# EAGLE board unbiased electronic dice (EAGLE 9.6.0)
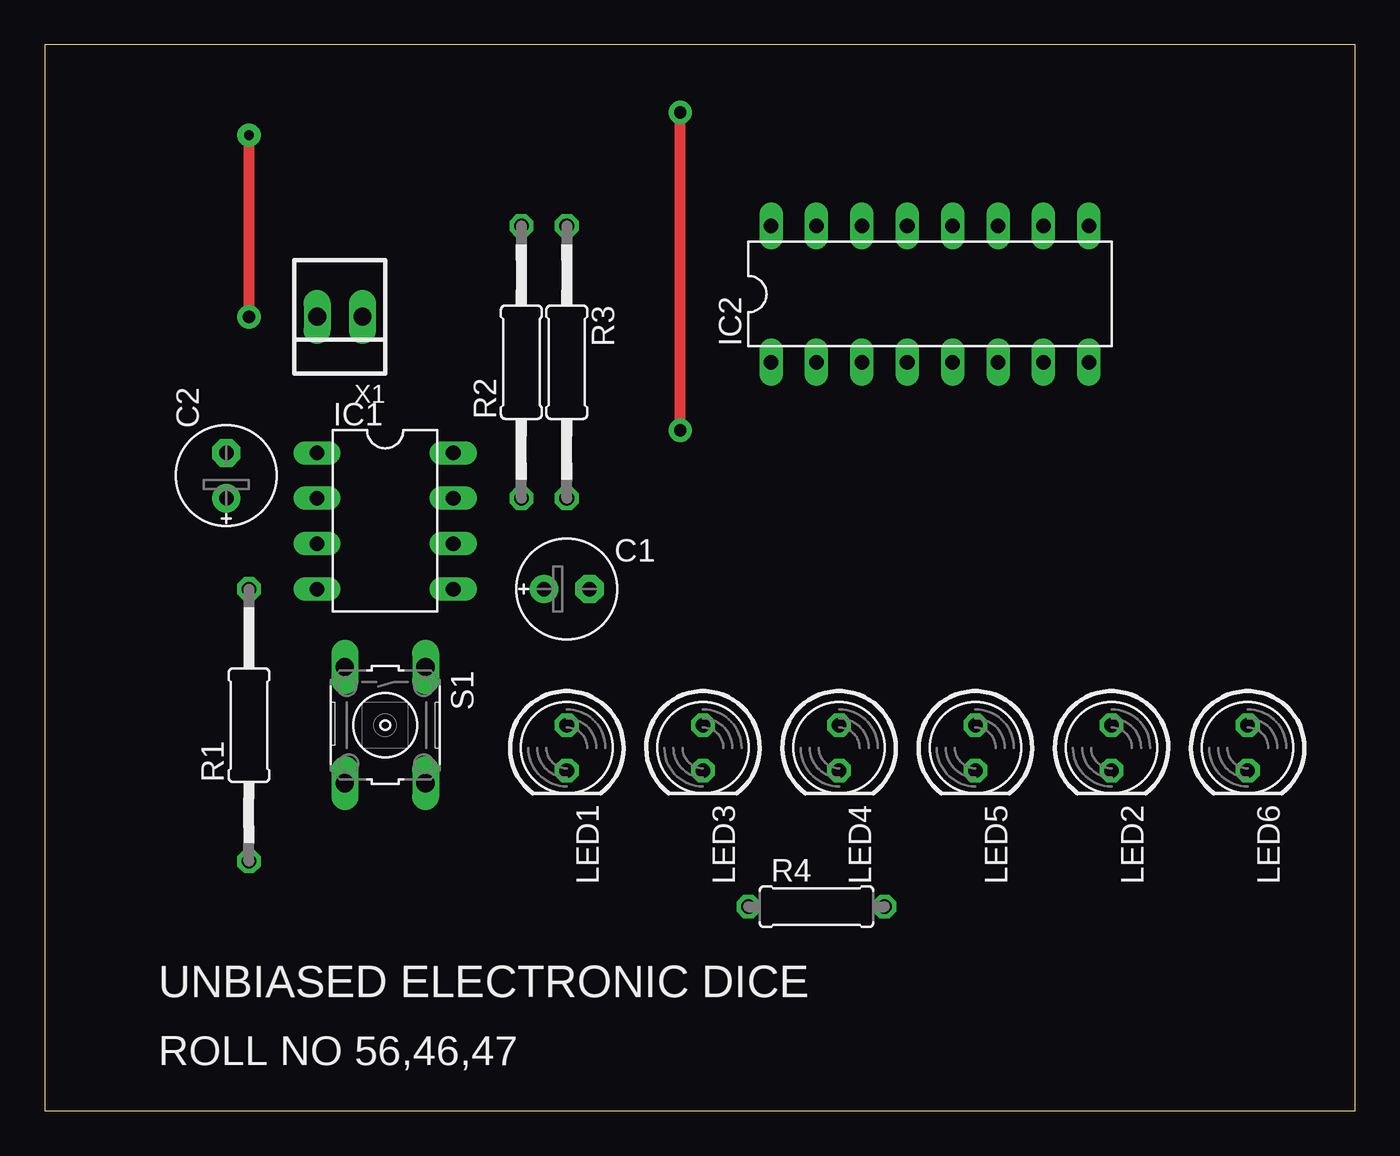
[diagram p0: board, top side]
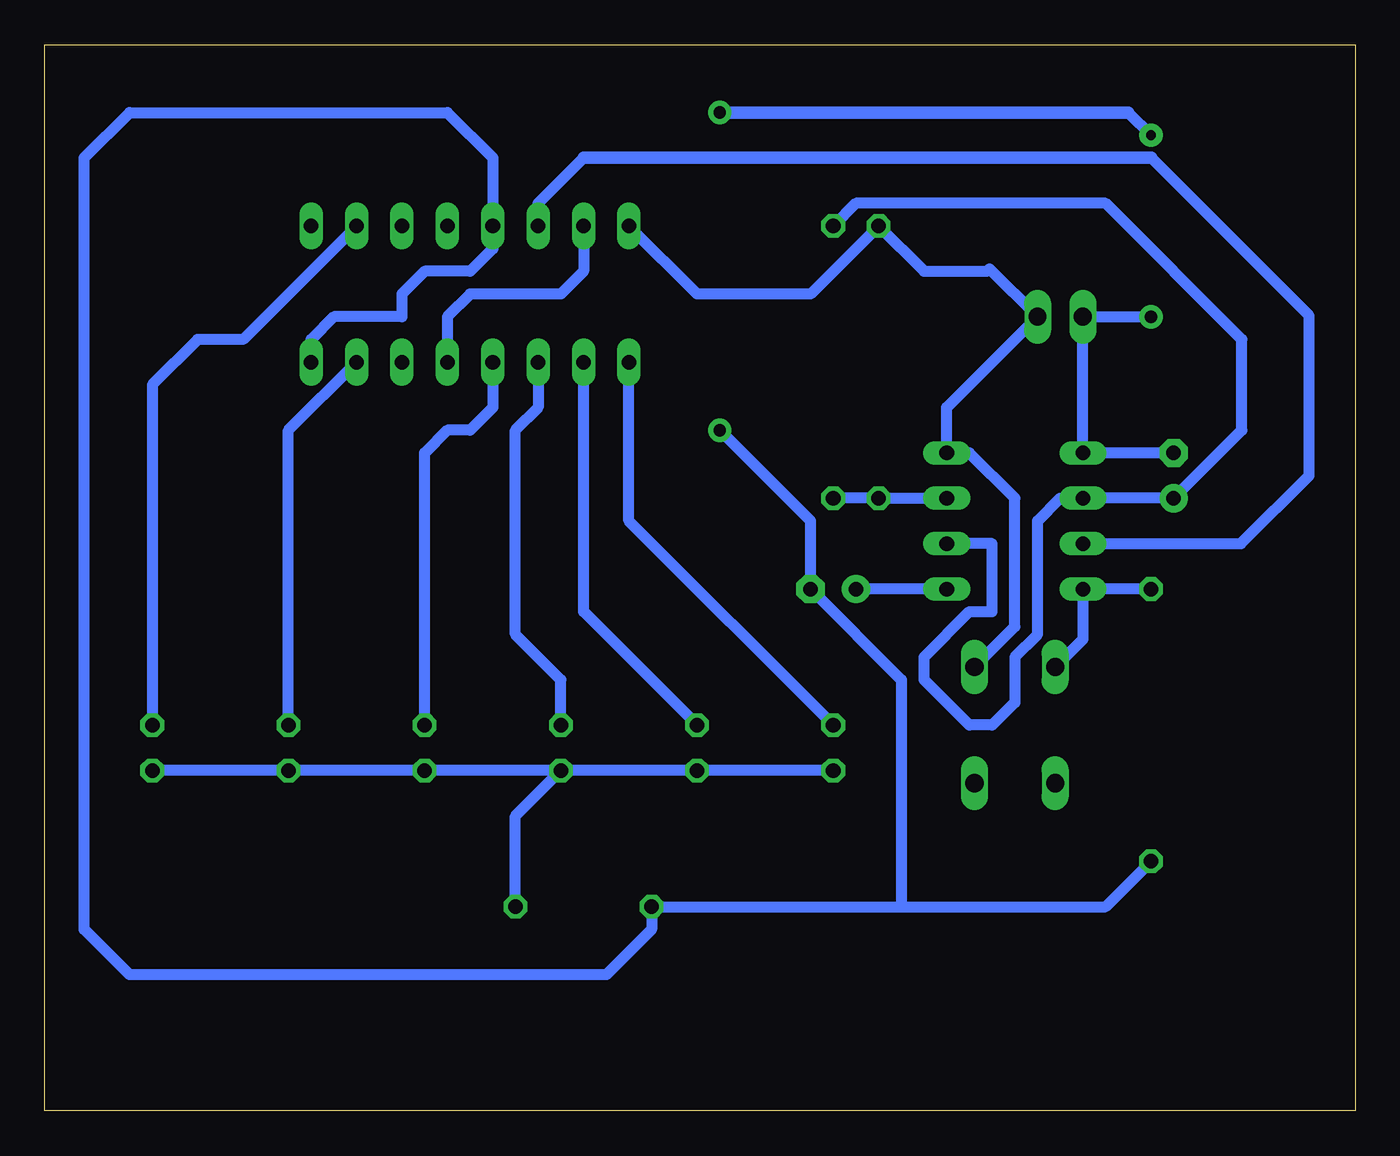
[diagram p1: board, bottom side, seen from below]

Size 73.33 x 59.68 mm. Coordinates in mm from the lower left corner, seen from the top.
Outline: 0,0 73.33,0 73.33,59.68 0,59.68 0,0
Copper layers (1*16): Top 0.035mm / dielectric 1.5mm / Bottom 0.035mm
Design rules "default": minimum track width 6mil, minimum drill 0.35mm, track to track 6mil, track to pad 6mil, pad to pad 6mil, via to via 6mil, smd to smd 6mil, copper to edge 40mil, drill to drill 6mil, minimum pad ring 10mil, minimum via ring 8mil, stop-mask expansion 4mil, vias tented up to drill 0mil, thermal gap 10mil
Net classes: 0 default: width 0.61 mm, drill 0.686 mm, clearance 0.254 mm

## Footprints (pad centres in the part's own frame; a part is rotated, then mirrored left to right if it is on the bottom)
E2,5-6E = drill 0.813 pad 1.575: + -1.27,0 | drill 0.813 pad 1.575 octagon: - 1.27,0
DIL-08 = drill 0.813 long: 1 -3.81,-3.81; 2 -1.27,-3.81; 3 1.27,-3.81; 4 3.81,-3.81; 5 3.81,3.81; 6 1.27,3.81; 7 -1.27,3.81; 8 -3.81,3.81
DIL16 = drill 0.813 long: 1 -8.89,-3.81; 2 -6.35,-3.81; 3 -3.81,-3.81; 4 -1.27,-3.81; 5 1.27,-3.81; 6 3.81,-3.81; 7 6.35,-3.81; 8 8.89,-3.81; 9 8.89,3.81; 10 6.35,3.81; 11 3.81,3.81; 12 1.27,3.81; 13 -1.27,3.81; 14 -3.81,3.81; 15 -6.35,3.81; 16 -8.89,3.81
LED5MM = drill 0.813 octagon: A -1.27,0; K 1.27,0
0207/15 = drill 0.813 octagon: 1 -7.62,0; 2 7.62,0
0207/7 = drill 0.813 octagon: 1 -3.81,0; 2 3.81,0
B3F-10XX = drill 1.016 long: 1 -3.251,2.261; 2 3.251,2.261; 3 -3.251,-2.261; 4 3.251,-2.261
22-23-2021 = drill 1 long: 1 -1.27,0; 2 1.27,0

## Placement (x,y rotation side)
C1  [E2,5-6E]  29.21,29.21 0 top
C2  [E2,5-6E]  10.16,35.56 90 top
IC1  NE555  [DIL-08]  19.05,33.02 270 top
IC2  4017N  [DIL16]  49.53,45.72 0 top
LED1  [LED5MM]  29.21,20.32 270 top
LED2  [LED5MM]  59.69,20.32 270 top
LED3  [LED5MM]  36.83,20.32 270 top
LED4  [LED5MM]  44.45,20.32 270 top
LED5  [LED5MM]  52.07,20.32 270 top
LED6  [LED5MM]  67.31,20.32 270 top
R1  [0207/15]  11.43,21.59 90 top
R2  [0207/15]  26.67,41.91 90 top
R3  [0207/15]  29.21,41.91 270 top
R4  [0207/7]  43.18,11.43 0 top
S1  [B3F-10XX]  19.05,21.59 270 top
X1  22-23-2021  [22-23-2021]  16.51,44.45 180 top

## Library data of the parts
C1 C2 = rcl; OC_FARNELL: unknown; SPICEPREFIX: C
IC1 = st-microelectronics; MF: STMICROELECTRONICS; MPN: NE555N; OC_FARNELL: 1467742; OC_NEWARK: 89K1486
IC2 = 40xx; OC_FARNELL: unknown
LED1-LED6 = led
R1-R3 = rcl; MF: AMPHENOL INDUSTRIAL; MPN: MS27474E20F16P; OC_FARNELL: 1590207; SPICEPREFIX: R
R4 = rcl; SPICEPREFIX: R
S1 = switch-omron; MPN: B3F-1000; OC_FARNELL: 176432; OC_NEWARK: 36M3542
X1 = con-molex; MF: MOLEX; MPN: 22-23-2021; OC_FARNELL: 1462926; OC_NEWARK: 25C3832

## Nets
GND: C1.- C2.- IC1.1 IC2.8 IC2.13 R1.1 R4.1 X1.2
N$1: IC1.7 R2.1 R3.2
N$2: IC1.3 IC2.14
N$3: IC1.4 R1.2 S1.3
N$4: C1.+ IC1.5
N$5: C2.+ IC1.2 IC1.6 R3.1
N$6: IC2.3 LED4.A
N$7: IC2.2 LED3.A
N$8: IC2.4 LED5.A
N$9: IC2.7 LED2.A
N$10: IC2.10 LED6.A
N$11: IC2.1 LED1.A
N$12: IC2.5 IC2.15
N$14: LED1.K LED2.K LED3.K LED4.K LED5.K LED6.K R4.2
VCC: IC1.8 IC2.16 R2.2 S1.1 X1.1

## Tracks (layer width: path | path; a pad name or v marks a point on that pad's centre or on a via)
GND  (via drill 0.55 pad 1.3, 0.69 pad 0.6)
  Top 0.61: v35.56,38.1 v35.56,55.88 | v11.43,54.61 v11.43,44.45
  Bottom 0.61: 11.58,13.82 R1.1 13.97,11.43 25.4,11.43 | 25.4,11.43 R4.1 39.37,10.16 41.91,7.62 68.58,7.62 71.12,10.16 71.12,53.34 68.58,55.88 50.8,55.88 48.26,53.34 IC2.13 48.26,48.26 49.53,46.99 52.07,46.99 53.34,45.72 53.34,44.45 57.15,44.45 58.42,43.18 IC2.8 | C2.- IC1.1 X1.2 v11.43,44.45 | v35.56,38.1 30.48,33.02 C1.- 25.4,24.13 25.4,11.43 | 12.7,55.88 v11.43,54.61
  Bottom 0.686: v35.56,55.88 12.7,55.88
N$1
  Bottom 0.61: R2.1 IC1.7 | R2.1 26.67,34.52 26.7,34.54 | R2.1 R3.2
N$2
  Bottom 0.61: IC1.3 6.4,31.75 2.59,35.56 2.59,44.5 11.43,53.34 | 43.18,53.34 45.72,50.8 IC2.14
  Bottom 0.686: 11.43,53.34 43.18,53.34
N$3
  Bottom 0.61: 11.58,29.36 R1.2 IC1.4 15.24,26.39 S1.3
N$4
  Bottom 0.61: IC1.5 C1.+
N$5
  Bottom 0.61: R3.1 27.94,50.8 13.97,50.8 6.35,43.18 6.35,38.1 C2.+ IC1.2 16.51,34.29 17.78,33.02 17.78,26.67 19.05,25.4 19.05,22.86 20.32,21.59 21.59,21.59 24.13,24.13 24.13,25.4 21.59,27.94 20.32,27.94 20.32,31.75 IC1.6
N$6
  Bottom 0.61: LED4.A 44.45,24.13 46.99,26.67 46.99,38.1 45.72,39.37 IC2.3
N$7
  Bottom 0.61: LED3.A 43.18,27.94 IC2.2
N$8
  Bottom 0.61: LED5.A 52.07,36.83 50.8,38.1 49.53,38.1 48.26,39.37 IC2.4
N$9
  Bottom 0.61: LED2.A 59.69,38.1 IC2.7
N$10
  Bottom 0.61: IC2.10 62.23,43.18 64.77,43.18 67.31,40.64 LED6.A
N$11
  Bottom 0.61: LED1.A 40.64,33.02 IC2.1
N$12
  Bottom 0.61: IC2.15 43.18,46.99 44.45,45.72 49.53,45.72 50.8,44.45 IC2.5
N$14
  Bottom 0.61: R4.2 46.99,16.51 LED4.K LED5.K | LED5.K LED3.K LED1.K | LED5.K LED6.K LED2.K
VCC
  Bottom 0.61: S1.1 19.05,27.1 19.05,34.29 21.59,36.83 IC1.8 22.86,39.37 X1.1 20.46,47.13 20.64,46.99 24.13,46.99 R2.2 30.48,45.72 36.83,45.72 IC2.16

## Text on the board
tPlace: UNBIASED ELECTRONIC DICE | ROLL NO 56,46,47